# EAGLE board PowerLineSwtich (EAGLE 8.1.1)
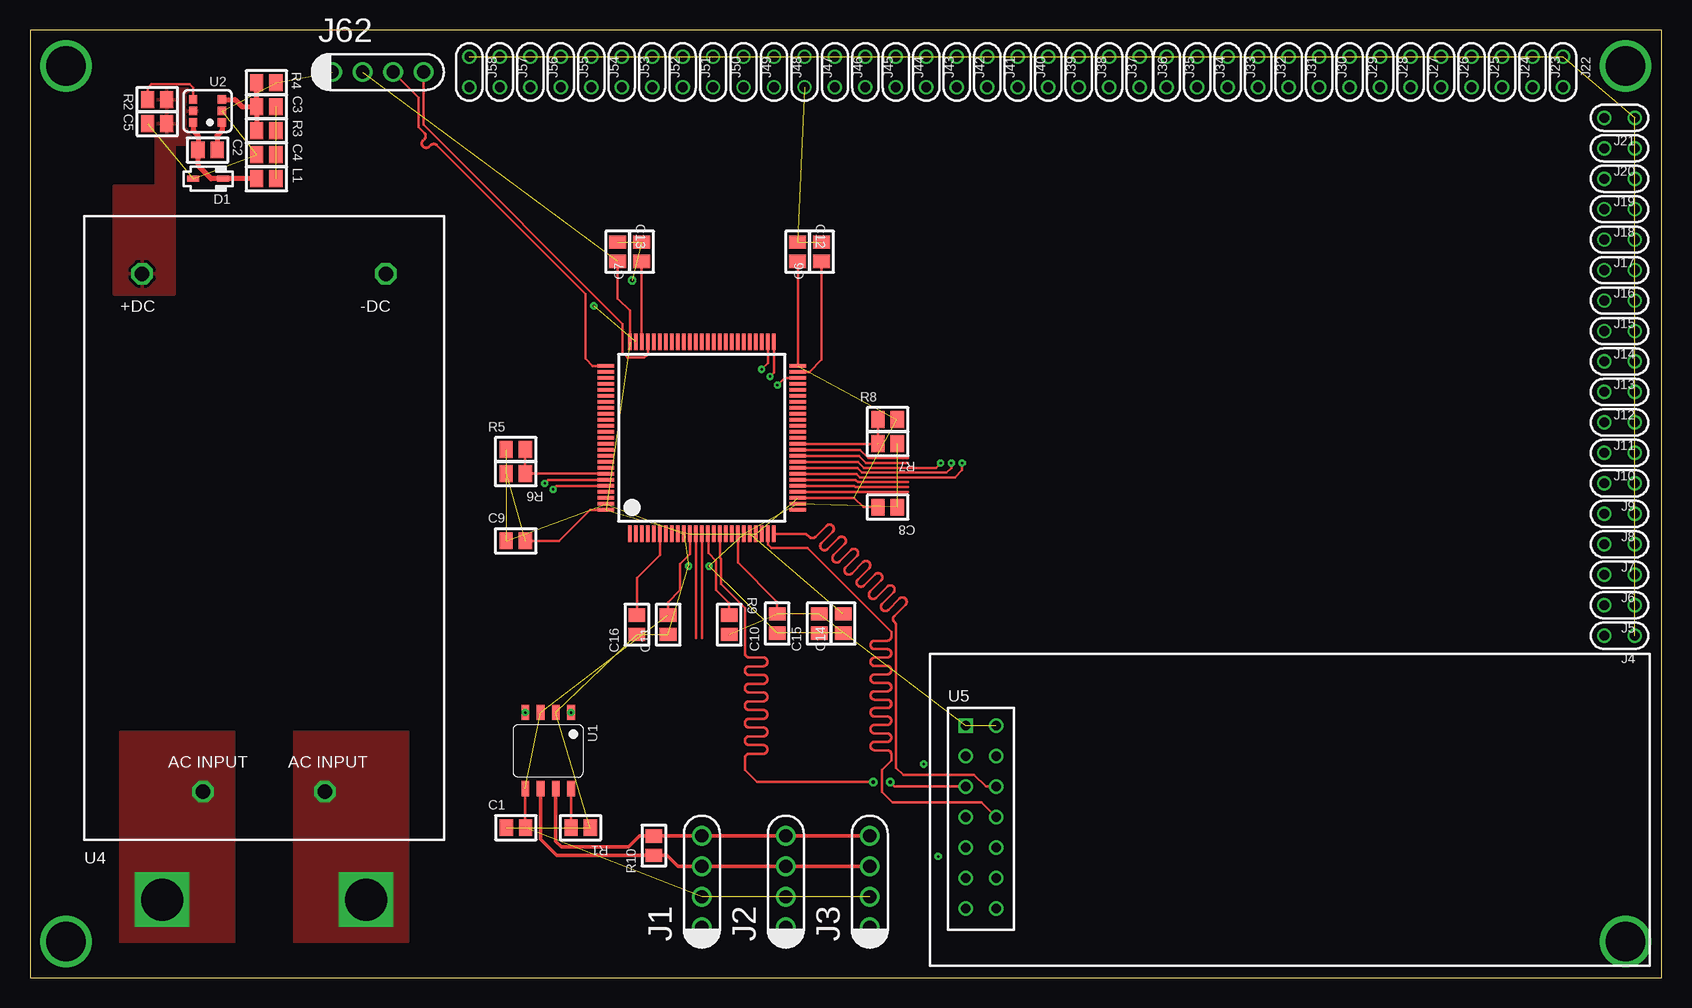
[diagram p0: board, top side]
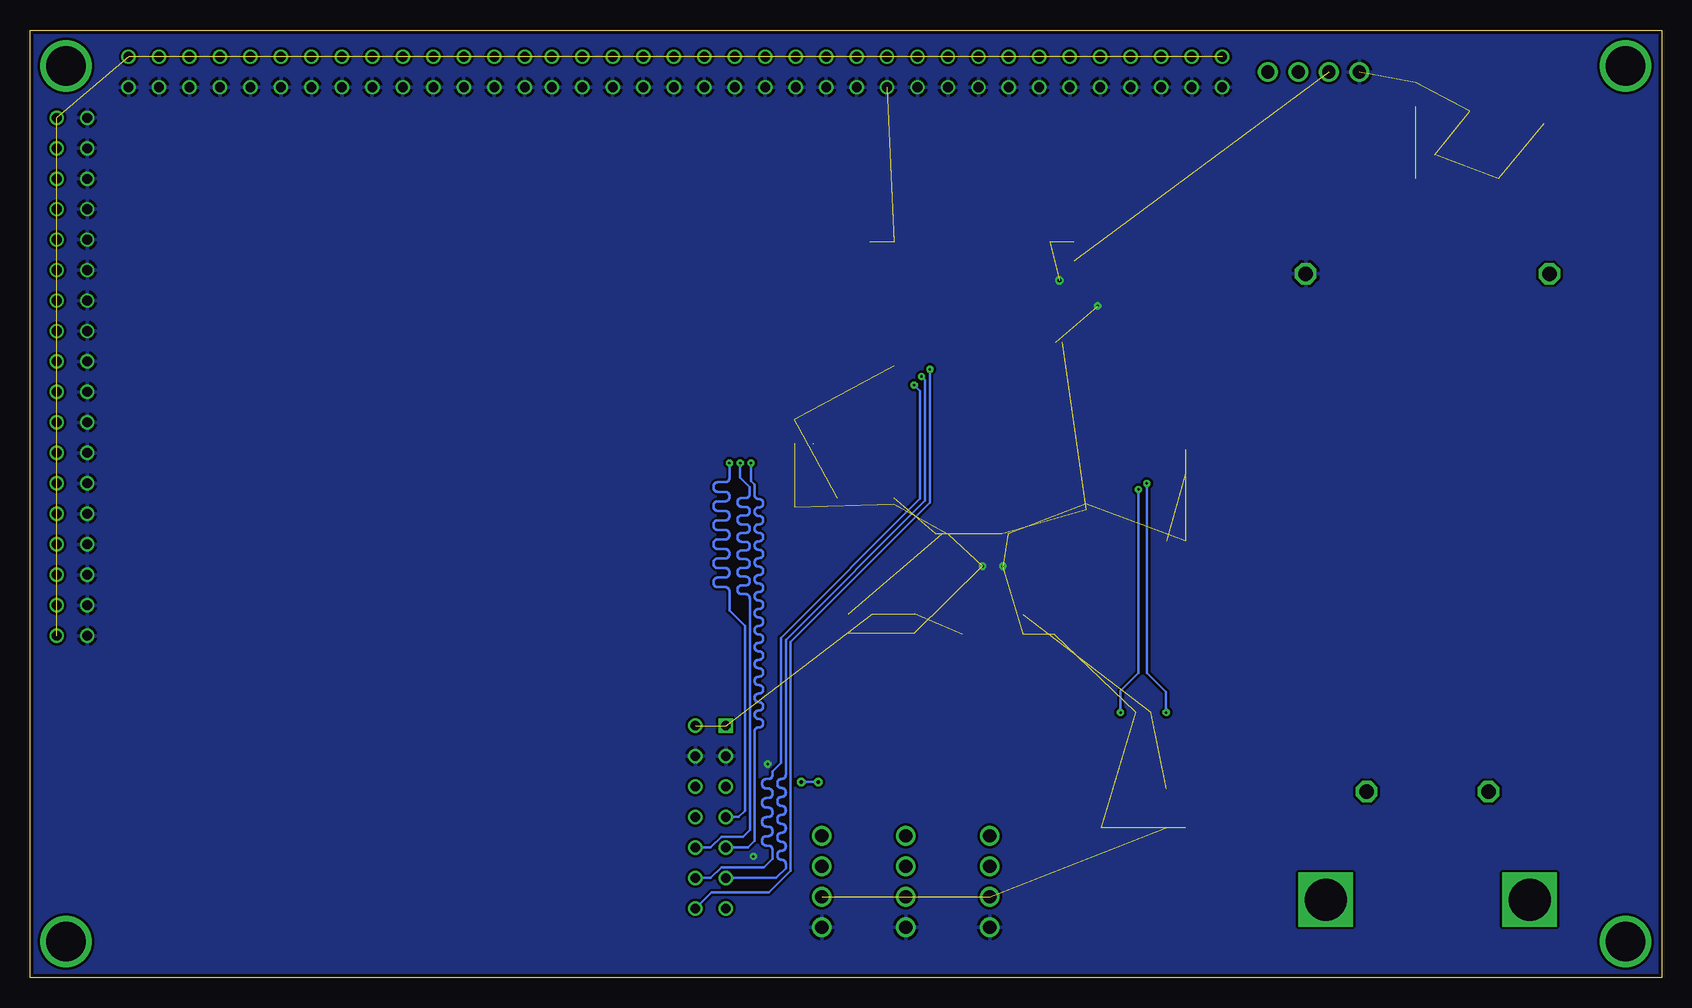
[diagram p1: board, bottom side, seen from below]

Size 136 x 79 mm. Coordinates in mm from the lower left corner, seen from the top.
Outline: 0,0 136,0 136,79 0,79 0,0
Copper layers (1*2*15*16): Top 0.035mm / dielectric 0.2mm / Route2 0.035mm / dielectric 1.06mm / Route15 0.035mm / dielectric 0.2mm / Bottom 0.035mm
Design rules "hsdgt3": minimum track width 0.2mm, minimum drill 0.2mm, track to track 0.2mm, track to pad 0.2mm, pad to pad 0.2mm, via to via 0.2mm, smd to smd 0mil, copper to edge 0.3mm, drill to drill 8mil, minimum pad ring 0.2mm, minimum via ring 0.2mm, stop-mask expansion 0mil, vias tented up to drill 0.3mm, thermal gap 10mil

## Footprints (pad centres in the part's own frame; a part is rotated, then mirrored left to right if it is on the bottom)
2012 = smd 1.4 x 1.1: P$1 0,0.8; P$2 0,-0.8
SOD323 = smd 1 x 0.5: A -1.3,0; K 1.2,0
4PIN = drill 1.1: P$1 -3.81,0; P$2 -1.27,0; P$3 1.27,0; P$4 3.81,0
2PIN = drill 0.8: P$1 -1.27,0; P$2 1.27,0
PG-DSO-8 = smd 1.27 x 0.635: P1 0,0; P2 0,-1.27; P3 0,-2.54; P4 0,-3.81; P5 6.35,-3.81; P6 6.35,-2.54; P7 6.35,-1.27; P8 6.35,0
SOT-26 = smd 0.7 x 0.7: P1 0,0; P2 0,-0.95; P3 0,-1.9; P4 2.4,-1.9; P5 2.4,-0.95; P6 2.4,0
LQFP100 = smd 0.3 x 1.4: P$1 -6,-8; P$2 -5.5,-8; P$3 -5,-8; P$4 -4.5,-8; P$5 -4,-8; P$6 -3.5,-8; P$7 -3,-8; P$8 -2.5,-8; P$9 -2,-8; P$10 -1.5,-8; P$11 -1,-8; P$12 -0.5,-8; P$13 0,-8; P$14 0.5,-8; P$15 1,-8; P$16 1.5,-8; P$17 2,-8; P$18 2.5,-8; P$19 3,-8; P$20 3.5,-8; P$21 4,-8; P$22 4.5,-8; P$23 5,-8; P$24 5.5,-8; P$25 6,-8; P$51 6,8; P$52 5.5,8; P$53 5,8; P$54 4.5,8; P$55 4,8; P$56 3.5,8; P$57 3,8; P$58 2.5,8; P$59 2,8; P$60 1.5,8; P$61 1,8; P$62 0.5,8; P$63 0,8; P$64 -0.5,8; P$65 -1,8; P$66 -1.5,8; P$67 -2,8; P$68 -2.5,8; P$69 -3,8; P$70 -3.5,8; P$71 -4,8; P$72 -4.5,8; P$73 -5,8; P$74 -5.5,8; P$75 -6,8 | smd 1.4 x 0.3: P$26 8,-6; P$27 8,-5.5; P$28 8,-5; P$29 8,-4.5; P$30 8,-4; P$31 8,-3.5; P$32 8,-3; P$33 8,-2.5; P$34 8,-2; P$35 8,-1.5; P$36 8,-1; P$37 8,-0.5; P$38 8,0; P$39 8,0.5; P$40 8,1; P$41 8,1.5; P$42 8,2; P$43 8,2.5; P$44 8,3; P$45 8,3.5; P$46 8,4; P$47 8,4.5; P$48 8,5; P$49 8,5.5; P$50 8,6; P$76 -8,6; P$77 -8,5.5; P$78 -8,5; P$79 -8,4.5; P$80 -8,4; P$81 -8,3.5; P$82 -8,3; P$83 -8,2.5; P$84 -8,2; P$85 -8,1.5; P$86 -8,1; P$87 -8,0.5; P$88 -8,0; P$89 -8,-0.5; P$90 -8,-1; P$91 -8,-1.5; P$92 -8,-2; P$93 -8,-2.5; P$94 -8,-3; P$95 -8,-3.5; P$96 -8,-4; P$97 -8,-4.5; P$98 -8,-5; P$99 -8,-5.5; P$100 -8,-6
GMSXXXX = drill 1.2 octagon: P1 -5.08,0; P2 5.08,0; P3 10.16,43.18; P4 -10.16,43.18
7X2 = drill 0.8 square: P1 0,0 | drill 0.8: P2 2.54,0; P3 0,-2.54; P4 2.54,-2.54; P5 0,-5.08; P6 2.54,-5.08; P7 0,-7.62; P8 2.54,-7.62; P9 0,-10.16; P10 2.54,-10.16; P11 0,-12.7; P12 2.54,-12.7; P13 0,-15.24; P14 2.54,-15.24

## Placement (x,y rotation side)
C1  100nF  [2012]  40.5,12.5 90 top
C2  22nF  [2012]  14.8,69 270 top
C3  100pF  [2012]  19.7,72.6 90 top
C4  22uF  [2012]  19.7,68.6 90 top
C5  22uF  [2012]  10.6,71.2 90 top
C6  2.2uF  [2012]  65.99,60.51 180 top
C7  2.2uF  [2012]  50.99,60.51 180 top
C8  4.7uF  [2012]  71.49,39.21 270 top
C9  1uF  [2012]  40.49,36.41 90 top
C10  1uF  [2012]  62.29,29.51 180 top
C11  1uF  [2012]  53.19,29.41 180 top
C12  1uF  [2012]  63.99,60.51 0 top
C13  1uF  [2012]  48.99,60.51 0 top
C14  1uF  [2012]  67.79,29.51 180 top
C15  100nF  [2012]  65.79,29.51 180 top
C16  100nF  [2012]  50.59,29.41 180 top
D1  [SOD323]  14.9,66.6 0 top
J1  [4PIN]  56,8 90 top
J2  [4PIN]  63,8 90 top
J3  [4PIN]  70,8 90 top
J4  [2PIN]  132.5,28.5 180 top
J5  [2PIN]  132.5,31.04 180 top
J6  [2PIN]  132.5,33.58 180 top
J7  [2PIN]  132.5,36.12 180 top
J8  [2PIN]  132.5,38.66 180 top
J9  [2PIN]  132.5,41.2 180 top
J10  [2PIN]  132.5,43.74 180 top
J11  [2PIN]  132.5,46.28 180 top
J12  [2PIN]  132.5,48.82 180 top
J13  [2PIN]  132.5,51.36 180 top
J14  [2PIN]  132.5,53.9 180 top
J15  [2PIN]  132.5,56.44 180 top
J16  [2PIN]  132.5,58.98 180 top
J17  [2PIN]  132.5,61.52 180 top
J18  [2PIN]  132.5,64.06 180 top
J19  [2PIN]  132.5,66.6 180 top
J20  [2PIN]  132.5,69.14 180 top
J21  [2PIN]  132.5,71.68 180 top
J22  [2PIN]  127.78,75.5 270 top
J23  [2PIN]  125.24,75.5 270 top
J24  [2PIN]  122.7,75.5 270 top
J25  [2PIN]  120.16,75.5 270 top
J26  [2PIN]  117.62,75.5 270 top
J27  [2PIN]  115.08,75.5 270 top
J28  [2PIN]  112.54,75.5 270 top
J29  [2PIN]  110,75.5 270 top
J30  [2PIN]  107.46,75.5 270 top
J31  [2PIN]  104.92,75.5 270 top
J32  [2PIN]  102.38,75.5 270 top
J33  [2PIN]  99.84,75.5 270 top
J34  [2PIN]  97.3,75.5 270 top
J35  [2PIN]  94.76,75.5 270 top
J36  [2PIN]  92.5,75.5 270 top
J37  [2PIN]  89.96,75.5 270 top
J38  [2PIN]  87.42,75.5 270 top
J39  [2PIN]  84.88,75.5 270 top
J40  [2PIN]  82.34,75.5 270 top
J41  [2PIN]  79.8,75.5 270 top
J42  [2PIN]  77.26,75.5 270 top
J43  [2PIN]  74.72,75.5 270 top
J44  [2PIN]  72.18,75.5 270 top
J45  [2PIN]  69.64,75.5 270 top
J46  [2PIN]  67.1,75.5 270 top
J47  [2PIN]  64.56,75.5 270 top
J48  [2PIN]  62.02,75.5 270 top
J49  [2PIN]  59.48,75.5 270 top
J50  [2PIN]  56.94,75.5 270 top
J51  [2PIN]  54.4,75.5 270 top
J52  [2PIN]  51.86,75.5 270 top
J53  [2PIN]  49.32,75.5 270 top
J54  [2PIN]  46.78,75.5 270 top
J55  [2PIN]  44.24,75.5 270 top
J56  [2PIN]  41.7,75.5 270 top
J57  [2PIN]  39.16,75.5 270 top
J58  [2PIN]  36.62,75.5 270 top
J62  [4PIN]  29,75.5 0 top
L1  [2012]  19.7,66.6 90 top
R1  20K  [2012]  45.9,12.5 270 top
R2  100J  [2012]  10.6,73.2 90 top
R3  50K  [2012]  19.7,70.6 90 top
R4  16.2K  [2012]  19.7,74.6 270 top
R5  10K  [2012]  40.49,44.01 90 top
R6  10K  [2012]  40.49,42.01 270 top
R7  10K  [2012]  71.49,44.51 270 top
R8  10K  [2012]  71.49,46.51 90 top
R9  10K  [2012]  58.29,29.41 0 top
R10  120  [2012]  52,11 180 top
U1  [PG-DSO-8]  45.1,22.1 270 top
U2  [SOT-26]  16,71.3 180 top
U3  [LQFP100]  56,45 0 top
U4  [GMSXXXX]  19.5,15.5 0 top
U5  [7X2]  78,21 0 top

## Library data of the parts
C1-C16 L1 R1-R10 = passive
D1 = Diode
J1-J58 J62 = connector
U1 = CAN
U2 = Regulator
U3 = ST-MCU
U4 = ACDC
U5 = LAN

## Nets
5V: C5.P$2 R2.P$2 U2.P5 U4.P4
!NRST: R9.P$1 U3.P$14
AC+: U4.P1
AC-: U4.P2
BOOT0: R5.P$2 R6.P$1 U3.P$94
BOOT1: R7.P$2 R8.P$1 U3.P$37
BST: C2.P$1 U2.P1
CAN1_RX: U1.P4 U3.P$95
CAN1_TX: U1.P1 U3.P$96
CANH: J1.P$4 J2.P$4 J3.P$4 R10.P$2 U1.P7
CANL: J1.P$3 J2.P$3 J3.P$3 R10.P$1 U1.P6
CRS_DV: U3.P$32 U5.P7
DGND: C1.P$1 C4.P$1 C5.P$1 C6.P$2 C7.P$2 C8.P$1 C9.P$1 C10.P$1 C11.P$1 C12.P$1 C13.P$1 C14.P$1 C15.P$1 C16.P$1 D1.A J1.P$1 J2.P$1 J3.P$1 J4.P$2 J5.P$2 J6.P$2 J7.P$2 J8.P$2 J9.P$2 J10.P$2 J11.P$2 J12.P$2 J13.P$2 J14.P$2 J15.P$2 J16.P$2 J17.P$2 J18.P$2 J19.P$2 J20.P$2 J21.P$2 J22.P$2 J23.P$2 J24.P$2 J25.P$2 J26.P$2 J27.P$2 J28.P$2 J29.P$2 J30.P$2 J31.P$2 J32.P$2 J33.P$2 J34.P$2 J35.P$2 J36.P$2 J37.P$2 J38.P$2 J39.P$2 J40.P$2 J41.P$2 J42.P$2 J43.P$2 J44.P$2 J45.P$2 J46.P$2 J47.P$2 J48.P$2 J49.P$2 J50.P$2 J51.P$2 J52.P$2 J53.P$2 J54.P$2 J55.P$2 J56.P$2 J57.P$2 J58.P$2 J62.P$1 R1.P$1 R4.P$1 R5.P$1 R7.P$1 U1.P2 U2.P2 U3.P$10 U3.P$20 U3.P$27 U3.P$74 U3.P$99 U4.P3 U5.P3 U5.P4
EN: R2.P$1 U2.P4
FB: C3.P$1 R3.P$1 R4.P$2 U2.P3
JTDI: U3.P$77
JTDO: U3.P$89
MDC: U3.P$16 U5.P5
MDIO: U3.P$25 U5.P6
N$3: R1.P$2 U1.P8
N$6: J4.P$1 J5.P$1 J6.P$1 J7.P$1 J8.P$1 J9.P$1 J10.P$1 J11.P$1 J12.P$1 J13.P$1 J14.P$1 J15.P$1 J16.P$1 J17.P$1 J18.P$1 J19.P$1 J20.P$1 J21.P$1 J22.P$1 J23.P$1 J24.P$1 J25.P$1 J26.P$1 J27.P$1 J28.P$1 J29.P$1 J30.P$1 J31.P$1 J32.P$1 J33.P$1 J34.P$1 J35.P$1 J36.P$1 J37.P$1 J38.P$1 J39.P$1 J40.P$1 J41.P$1 J42.P$1 J43.P$1 J44.P$1 J45.P$1 J46.P$1 J47.P$1 J48.P$1 J49.P$1 J50.P$1 J51.P$1 J52.P$1 J53.P$1 J54.P$1 J55.P$1 J56.P$1 J57.P$1 J58.P$1
NJRST: U3.P$90
OSC_IN: U3.P$12
OSC_OUT: U3.P$13
PA0: U3.P$23
PA3: U3.P$26
PA4: U3.P$29
PA5: U3.P$30
PA6: U3.P$31
PA8: U3.P$67
PA9: U3.P$68
PA10: U3.P$69
PA11: U3.P$70
PA12: U3.P$71
PB0: U3.P$35
PB1: U3.P$36
PB5: U3.P$91
PB6: U3.P$92
PB7: U3.P$93
PB10: U3.P$47
PB14: U3.P$53
PB15: U3.P$54
PC0: U3.P$15
PC2: U3.P$17
PC3: U3.P$18
PC6: U3.P$63
PC7: U3.P$64
PC8: U3.P$65
PC9: U3.P$66
PC10: U3.P$78
PC11: U3.P$79
PC12: U3.P$80
PC13: U3.P$7
PC14: U3.P$8
PC15: U3.P$9
PD0: U3.P$81
PD1: U3.P$82
PD2: U3.P$83
PD3: U3.P$84
PD4: U3.P$85
PD5: U3.P$86
PD6: U3.P$87
PD7: U3.P$88
PD8: U3.P$55
PD9: U3.P$56
PD10: U3.P$57
PD11: U3.P$58
PD12: U3.P$59
PD13: U3.P$60
PD14: U3.P$61
PD15: U3.P$62
PE0: U3.P$97
PE1: U3.P$98
PE2: U3.P$1
PE3: U3.P$2
PE4: U3.P$3
PE5: U3.P$4
PE6: U3.P$5
PE7: U3.P$38
PE8: U3.P$39
PE9: U3.P$40
PE10: U3.P$41
PE11: U3.P$42
PE12: U3.P$43
PE13: U3.P$44
PE14: U3.P$45
PE15: U3.P$46
R_RXCLK: U3.P$24 U5.P8
RXD0: U3.P$33 U5.P10
RXD1: U3.P$34 U5.P9
SW: C2.P$2 D1.K L1.P$1 U2.P6
SWCLK: J62.P$3 U3.P$76
SWDIO: J62.P$4 U3.P$72
TX_EN: U3.P$48 U5.P12
TXD0: U3.P$51 U5.P11
TXD1: U3.P$52 U5.P14
VBAT: C16.P$2 U3.P$6
VCAP1: C6.P$1 U3.P$49
VCAP2: C7.P$1 U3.P$73
VCC: C1.P$2 C8.P$2 C9.P$2 C10.P$2 C11.P$2 C12.P$2 C13.P$2 C15.P$2 J1.P$2 J2.P$2 J3.P$2 J62.P$2 R6.P$2 R8.P$2 R9.P$2 U1.P3 U1.P5 U3.P$11 U3.P$19 U3.P$22 U3.P$28 U3.P$50 U3.P$75 U3.P$100 U5.P1 U5.P2
VOUT: C3.P$2 C4.P$2 L1.P$2 R3.P$2
VREF: C14.P$2 U3.P$21

## Tracks (layer width: path | path; a pad name or v marks a point on that pad's centre or on a via)
5V
  pour Top (isolate 0.2, rank 2): 10.5,74.5 13.9,74.5 13.9,69.5 12,69.5 12,57 7,57 7,66 10.5,66
!NRST
  Top 0.2: U3.P$14 56.55,36.95 56.55,35.38 57.2,34.73 57.2,32.3 58.29,31.21 R9.P$1
AC+  (via drill 3.5)
  other vias: 11,6.5
  pour Top (rank 3, no thermals): 7.5,3 17,3 17,20.5 7.5,20.5
AC-  (via drill 3.5)
  other vias: 28,6.5
  pour Top (rank 3, no thermals): 22,20.5 22,3 31.5,3 31.5,20.5
BOOT0
  Top 0.2: U3.P$94 R6.P$1 R5.P$2
BOOT1  (1 unrouted)
  Top 0.2: U3.P$37 R7.P$2 | R8.P$1 R7.P$2
BST
  Top 0.4: U2.P1 16,70.6 15.6,70.2 C2.P$1
CAN1_RX  (via drill 0.2)
  Top 0.2: U3.P$95 43.2,41.5 v42.9,41.2
  Bottom 0.2: v42.9,41.2 42.9,25.4 41.3,23.8 U1.P4
  other vias: 41.29,22.1
CAN1_TX  (via drill 0.2)
  Top 0.2: U3.P$96 43.9,41 v43.6,40.7
  Bottom 0.2: v43.6,40.7 43.6,25.4 45.1,23.9 U1.P1
  other vias: 45.1,22.1
CANH
  Top 0.3: J3.P$4 J2.P$4 J1.P$4 R10.P$2 50.8,11.8 49.9,10.9 44.3,10.9 43.83,11.37 U1.P7
CANL
  Top 0.3: J3.P$3 J2.P$3 J1.P$3 54.03,9.27 53.1,10.2 R10.P$1 43.9,10.2 42.56,11.54 U1.P6
CRS_DV  (via drill 0.2)
  Top 0.2: U3.P$32 68.9,42 69.2,41.7 77.1,41.7 77.7,42.3 v77.7,42.9
  Bottom 0.2: U5.P7 76.92,13.38 76.4,13.9 76.4,29.3 77.7,30.6 77.7,32.2 arc-90 78.05,32.55 78.68,32.55 arc90 79.03,32.9 79.03,32.99 arc90 78.68,33.34 78.05,33.34 arc-90 77.7,33.7 77.7,33.79 arc-90 78.05,34.14 78.68,34.14 arc90 79.03,34.49 79.03,34.58 arc90 78.68,34.93 78.05,34.93 arc-90 77.7,35.28 77.7,35.38 arc-90 78.05,35.73 78.68,35.73 arc90 79.03,36.08 79.03,36.17 arc90 78.68,36.52 78.05,36.52 arc-90 77.7,36.87 77.7,36.97 arc-90 78.05,37.32 78.68,37.32 arc90 79.03,37.67 79.03,37.76 arc90 78.68,38.11 78.05,38.11 arc-90 77.7,38.46 77.7,38.56 arc-90 78.05,38.91 78.68,38.91 arc90 79.03,39.26 79.03,39.35 arc90 78.68,39.7 78.05,39.7 arc-90 77.7,40.05 77.7,40.15 arc-90 78.05,40.5 78.68,40.5 arc90 79.03,40.85 79.03,40.94 arc90 78.68,41.29 78.05,41.29 arc-90 77.7,41.64 v77.7,42.9
DGND  (via drill 0.2, 0.3)  (26 unrouted)
  other vias: 50.19,58.11 47,56 74.5,17.8 75.7,10.1 54.9,34.3 56.6,34.3
  pour Bottom (rank 4): 0,0 0,79 136,79 136,0
EN
  Top 0.2: U2.P4 13.6,74.2 13.3,74.5 10.1,74.5 9.8,74.2 R2.P$1
FB
  Top 0.4: C3.P$1 R3.P$1 | C3.P$1 R4.P$2 | U2.P3 17.1,73.2 17.7,72.6 C3.P$1
MDC  (via drill 0.3)
  Top 0.2: v71.7,16.3 72.08,15.92 U5.P5 | v70.3,16.3 60.6,16.3 59.6,17.3 59.6,18.3 arc-90 59.95,18.65 61.12,18.65 arc90 61.47,19 61.47,19.03 arc90 61.12,19.38 59.95,19.38 arc-90 59.6,19.73 59.6,19.76 arc-90 59.95,20.11 61.12,20.11 arc90 61.47,20.46 61.47,20.49 arc90 61.12,20.84 59.95,20.84 arc-90 59.6,21.19 59.6,21.22 arc-90 59.95,21.57 61.12,21.57 arc90 61.47,21.92 61.47,21.95 arc90 61.12,22.3 59.95,22.3 arc-90 59.6,22.65 59.6,22.68 arc-90 59.95,23.03 61.12,23.03 arc90 61.47,23.38 61.47,23.41 arc90 61.12,23.76 59.95,23.76 arc-90 59.6,24.11 59.6,24.14 arc-90 59.95,24.49 61.12,24.49 arc90 61.47,24.84 61.47,24.87 arc90 61.12,25.22 59.95,25.22 arc-90 59.6,25.57 59.6,25.61 arc-90 59.95,25.95 61.12,25.95 arc90 61.47,26.3 61.47,26.34 arc90 61.12,26.68 59.95,26.68 arc-90 59.6,27.04 59.6,30.8 57.6,32.8 57.6,34.9 57.5,35 U3.P$16
  Bottom 0.2: v71.7,16.3 v70.3,16.3
MDIO
  Top 0.2: U5.P6 79.68,15.92 78.7,16.9 72.8,16.9 72.2,17.5 72.2,29.5 72.05,29.65 arc-90 72.05,30.14 72.98,31.08 arc90 72.98,31.57 72.97,31.58 arc90 72.48,31.58 71.54,30.65 arc-90 71.05,30.65 71.04,30.66 arc-90 71.04,31.16 71.97,32.09 arc90 71.97,32.59 71.96,32.6 arc90 71.46,32.6 70.53,31.66 arc-90 70.03,31.66 70.02,31.68 arc-90 70.02,32.17 70.96,33.1 arc90 70.96,33.6 70.94,33.61 arc90 70.45,33.61 69.52,32.68 arc-90 69.02,32.68 69.01,32.69 arc-90 69.01,33.19 69.94,34.12 arc90 69.94,34.61 69.93,34.62 arc90 69.44,34.62 68.5,33.69 arc-90 68.01,33.69 68,33.7 arc-90 68,34.2 68.93,35.13 arc90 68.93,35.63 68.92,35.64 arc90 68.42,35.64 67.49,34.71 arc-90 66.99,34.71 66.98,34.72 arc-90 66.98,35.21 67.92,36.15 arc90 67.92,36.64 67.9,36.65 arc90 67.41,36.65 66.48,35.72 arc-90 65.98,35.72 65.97,35.73 arc-90 65.97,36.23 66.9,37.16 arc90 66.9,37.65 66.89,37.67 arc90 66.39,37.67 65.46,36.73 arc-90 64.97,36.73 64.7,37 U3.P$25
N$3
  Top 0.2: U1.P8 R1.P$2
N$5  (via drill 3.3)
  other vias: 3,3
N$6  (54 unrouted)
N$7  (via drill 3.3)
  other vias: 3,76
N$8  (via drill 3.3)
  other vias: 133,76
N$9  (via drill 3.3)
  other vias: 133,3
OSC_IN
  Top 0.2: U3.P$12 55.5,28.3
OSC_OUT
  Top 0.2: U3.P$13 56,28.3
PA4
  Top 0.2: U3.P$29 73.2,40.5
PA5
  Top 0.2: U3.P$30 68.7,41 68.8,40.9 73.2,40.9
PA6
  Top 0.2: U3.P$31 68.8,41.5 69,41.3 73.2,41.3
PB0
  Top 0.2: U3.P$35 69.1,43.5 69.7,42.9 73.2,42.9
PB1
  Top 0.2: U3.P$36 69.2,44 69.9,43.3 73.2,43.3
R_RXCLK
  Top 0.2: U5.P8 79.32,14.6 71.9,14.6 71,15.5 71,17.3 71.8,18.1 71.8,18.6 arc90 71.45,18.95 70.42,18.95 arc-90 70.06,19.3 70.06,19.3 arc-90 70.42,19.65 71.45,19.65 arc90 71.8,20 71.8,20 arc90 71.45,20.36 70.42,20.36 arc-90 70.06,20.7 70.06,20.71 arc-90 70.42,21.06 71.45,21.06 arc90 71.8,21.41 71.8,21.41 arc90 71.45,21.76 70.42,21.76 arc-90 70.06,22.11 70.06,22.11 arc-90 70.42,22.46 71.45,22.46 arc90 71.8,22.81 71.8,22.81 arc90 71.45,23.16 70.42,23.16 arc-90 70.06,23.51 70.06,23.52 arc-90 70.42,23.87 71.45,23.87 arc90 71.8,24.22 71.8,24.22 arc90 71.45,24.57 70.42,24.57 arc-90 70.06,24.92 70.06,24.92 arc-90 70.42,25.27 71.45,25.27 arc90 71.8,25.62 71.8,25.62 arc90 71.45,25.97 70.42,25.97 arc-90 70.06,26.32 70.06,26.33 arc-90 70.42,26.68 71.45,26.68 arc90 71.8,27.03 71.8,27.03 arc90 71.45,27.38 70.42,27.38 arc-90 70.06,27.73 70.06,27.73 arc-90 70.42,28.08 71.45,28.08 arc90 71.8,28.43 71.8,28.8 64.8,35.8 61.8,35.8 61.5,36.1 U3.P$24
RXD0  (via drill 0.2)
  Top 0.2: U3.P$33 68.97,42.5 69.37,42.1 76.4,42.1 76.8,42.5 v76.8,42.9
  Bottom 0.2: U5.P10 79.27,10.84 78.37,11.74 76.56,11.74 76,12.3 76,31.62 | 76,31.62 | 76,31.62 arc-90 76.35,31.97 76.68,31.97 arc90 77.03,32.32 77.03,32.34 arc90 76.68,32.69 76.35,32.69 arc-90 76,33.04 76,33.07 arc-90 76.35,33.42 76.68,33.42 arc90 77.03,33.77 77.03,33.8 arc90 76.68,34.15 76.35,34.15 arc-90 76,34.5 76,34.53 arc-90 76.35,34.88 76.68,34.88 arc90 77.03,35.23 77.03,35.26 arc90 76.68,35.6 76.35,35.6 arc-90 76,35.95 76,35.98 arc-90 76.35,36.33 76.68,36.33 arc90 77.03,36.68 77.03,36.71 arc90 76.68,37.06 76.35,37.06 arc-90 76,37.41 76,37.44 arc-90 76.35,37.79 76.68,37.79 arc90 77.03,38.14 77.03,38.17 arc90 76.68,38.52 76.35,38.52 arc-90 76,38.87 76,38.9 arc-90 76.35,39.24 76.68,39.24 arc90 77.03,39.59 77.03,39.62 arc90 76.68,39.97 76.35,39.97 arc-90 76,40.32 76,40.9 76.8,41.7 v76.8,42.9
RXD1  (via drill 0.2)
  Top 0.2: U3.P$34 69.03,43 69.53,42.5 75.5,42.5 v75.9,42.9
  Bottom 0.2: U5.P9 76.16,10.84 75.6,11.4 75.6,20.5 arc90 75.25,20.85 75.23,20.85 arc-90 74.88,21.2 74.88,21.2 arc-90 75.23,21.55 75.25,21.55 arc90 75.6,21.91 75.6,21.91 arc90 75.25,22.26 75.23,22.26 arc-90 74.88,22.61 74.88,22.62 arc-90 75.23,22.97 75.25,22.97 arc90 75.6,23.32 75.6,23.32 arc90 75.25,23.67 75.23,23.67 arc-90 74.88,24.02 74.88,24.03 arc-90 75.23,24.38 75.25,24.38 arc90 75.6,24.73 75.6,24.73 arc90 75.25,25.08 75.23,25.08 arc-90 74.88,25.43 74.88,25.44 arc-90 75.23,25.79 75.25,25.79 arc90 75.6,26.14 75.6,26.14 arc90 75.25,26.49 75.23,26.49 arc-90 74.88,26.84 74.88,26.85 arc-90 75.23,27.2 75.25,27.2 arc90 75.6,27.55 75.6,27.55 arc90 75.25,27.9 75.23,27.9 arc-90 74.88,28.25 74.88,28.26 arc-90 75.23,28.61 75.25,28.61 arc90 75.6,28.96 75.6,28.96 arc90 75.25,29.32 75.23,29.32 arc-90 74.88,29.66 74.88,29.67 arc-90 75.23,30.02 75.25,30.02 arc90 75.6,30.37 75.6,30.38 arc90 75.25,30.73 75.23,30.73 arc-90 74.88,31.08 74.88,31.08 arc-90 75.23,31.43 75.25,31.43 arc90 75.6,31.78 75.6,31.79 arc90 75.25,32.14 75.23,32.14 arc-90 74.88,32.49 74.88,32.49 arc-90 75.23,32.84 75.25,32.84 arc90 75.6,33.19 75.6,33.2 arc90 75.25,33.55 75.23,33.55 arc-90 74.88,33.9 74.88,33.9 arc-90 75.23,34.25 75.25,34.25 arc90 75.6,34.6 75.6,34.61 arc90 75.25,34.96 75.23,34.96 arc-90 74.88,35.31 74.88,35.31 arc-90 75.23,35.66 75.25,35.66 arc90 75.6,36.01 75.6,36.02 arc90 75.25,36.37 75.23,36.37 arc-90 74.88,36.72 74.88,36.73 arc-90 75.23,37.08 75.25,37.08 arc90 75.6,37.42 75.6,37.43 arc90 75.25,37.78 75.23,37.78 arc-90 74.88,38.13 74.88,38.14 arc-90 75.23,38.49 75.25,38.49 arc90 75.6,38.84 75.6,38.84 arc90 75.25,39.19 75.23,39.19 arc-90 74.88,39.54 74.88,39.55 arc-90 75.23,39.9 75.25,39.9 arc90 75.6,40.25 75.6,41.1 75.9,41.4 v75.9,42.9
SW
  Top 0.4: U2.P6 13.6,70.6 14,70.2 C2.P$2 14,67.7 15.1,66.6 D1.K L1.P$1
SWCLK
  Top 0.2: J62.P$3 32.4,73.37 32.4,70.9 32.89,70.41 arc-90 32.89,69.91 32.76,69.78 arc90 32.76,69.29 32.78,69.27 arc90 33.27,69.27 33.41,69.4 arc-90 33.9,69.4 46.3,57 46.3,51.6 46.9,51 U3.P$76
SWDIO
  Top 0.2: U3.P$72 51.5,52 51.2,51.7 49.8,51.7 49.4,52.1 49.4,54.5 32.81,71.09 J62.P$4
TX_EN  (via drill 0.2)
  Top 0.2: U3.P$48 62.9,50 v62.3,49.4
  Bottom 0.2: v62.3,49.4 61.8,48.9 61.8,39.93 73.4,28.33 73.4,17.9 74.11,17.19 74.11,16.9 arc90 74.46,16.55 74.62,16.55 arc-90 74.97,16.2 74.97,16.11 arc-90 74.62,15.76 74.46,15.76 arc90 74.11,15.41 74.11,15.31 arc90 74.46,14.96 74.62,14.96 arc-90 74.97,14.61 74.97,14.52 arc-90 74.62,14.17 74.46,14.17 arc90 74.11,13.82 74.11,13.73 arc90 74.46,13.38 74.62,13.38 arc-90 74.97,13.03 74.97,12.93 arc-90 74.62,12.58 74.46,12.58 arc90 74.11,12.23 74.11,12.14 arc90 74.46,11.79 74.62,11.79 arc-90 74.97,11.44 74.97,11.35 arc-90 74.62,10.99 74.46,10.99 arc90 74.11,10.64 74.11,10 | U5.P12 79.27,8.3 78.37,9.2 74.8,9.2 74.11,9.89 74.11,10 | 74.11,10
TXD0  (via drill 0.2)
  Top 0.2: U3.P$51 62,50.42 v61.69,50.11
  Bottom 0.2: U5.P11 73.8,8.3 73,9.1 73,9.47 arc-90 73.35,9.82 73.36,9.82 arc90 73.71,10.17 73.71,10.22 arc90 73.36,10.57 73.35,10.57 arc-90 73,10.92 73,10.97 arc-90 73.35,11.32 73.36,11.32 arc90 73.71,11.67 73.71,11.71 arc90 73.36,12.06 73.35,12.06 arc-90 73,12.41 73,12.46 arc-90 73.35,12.81 73.36,12.81 arc90 73.71,13.16 73.71,13.21 arc90 73.36,13.56 73.35,13.56 arc-90 73,13.91 73,13.96 arc-90 73.35,14.31 73.36,14.31 arc90 73.71,14.66 73.71,14.7 arc90 73.36,15.05 73.35,15.05 arc-90 73,15.4 73,15.45 arc-90 73.35,15.8 73.36,15.8 arc90 73.71,16.15 73.71,16.2 arc90 73.36,16.55 73.35,16.55 arc-90 73,16.9 73,28.17 61.39,39.78 61.39,49.81 v61.69,50.11
TXD1  (via drill 0.2)
  Top 0.2: U3.P$52 61.5,51.22 v60.99,50.71
  Bottom 0.2: U5.P14 79.2,7.1 74.4,7.1 72.6,8.9 72.6,28 60.99,39.61 v60.99,50.71
VBAT
  Top 0.2: U3.P$6 52.5,35.22 50.59,33.31 C16.P$2
VCAP1
  Top 0.2: U3.P$49 64.98,50.5 65.99,51.51 C6.P$1
VCAP2
  Top 0.2: U3.P$73 C7.P$1
VCC  (18 unrouted)
  Top 0.2: C10.P$2 62.29,31.31 59,34.6 U3.P$19 | U3.P$28 68.7,40 69.49,39.21 C8.P$2 | U3.P$75 50,55.6 48.99,56.61 C13.P$2 | U3.P$100 46.68,39 44.09,36.41 C9.P$2 | U3.P$50 C12.P$2 | U1.P5 C1.P$2 | C11.P$2 53.19,31.29 54.2,32.3 54.2,34.5 55,35.3 U3.P$11
VOUT  (3 unrouted)
VREF  (1 unrouted)